# Altium PCB ECTU_PCB.PcbDoc (part 3 of 3)
Units mm, origin at the board's own origin, x right, y up, seen from the top; angles counter-clockwise.
Board outline 155 x 102 mm, 4 copper layers (Top Layer, Mid Top, Mid Bottom, Bottom Layer), stack 0.603 mm thick; 266 components, 187 nets, 917 pads, 241 vias.
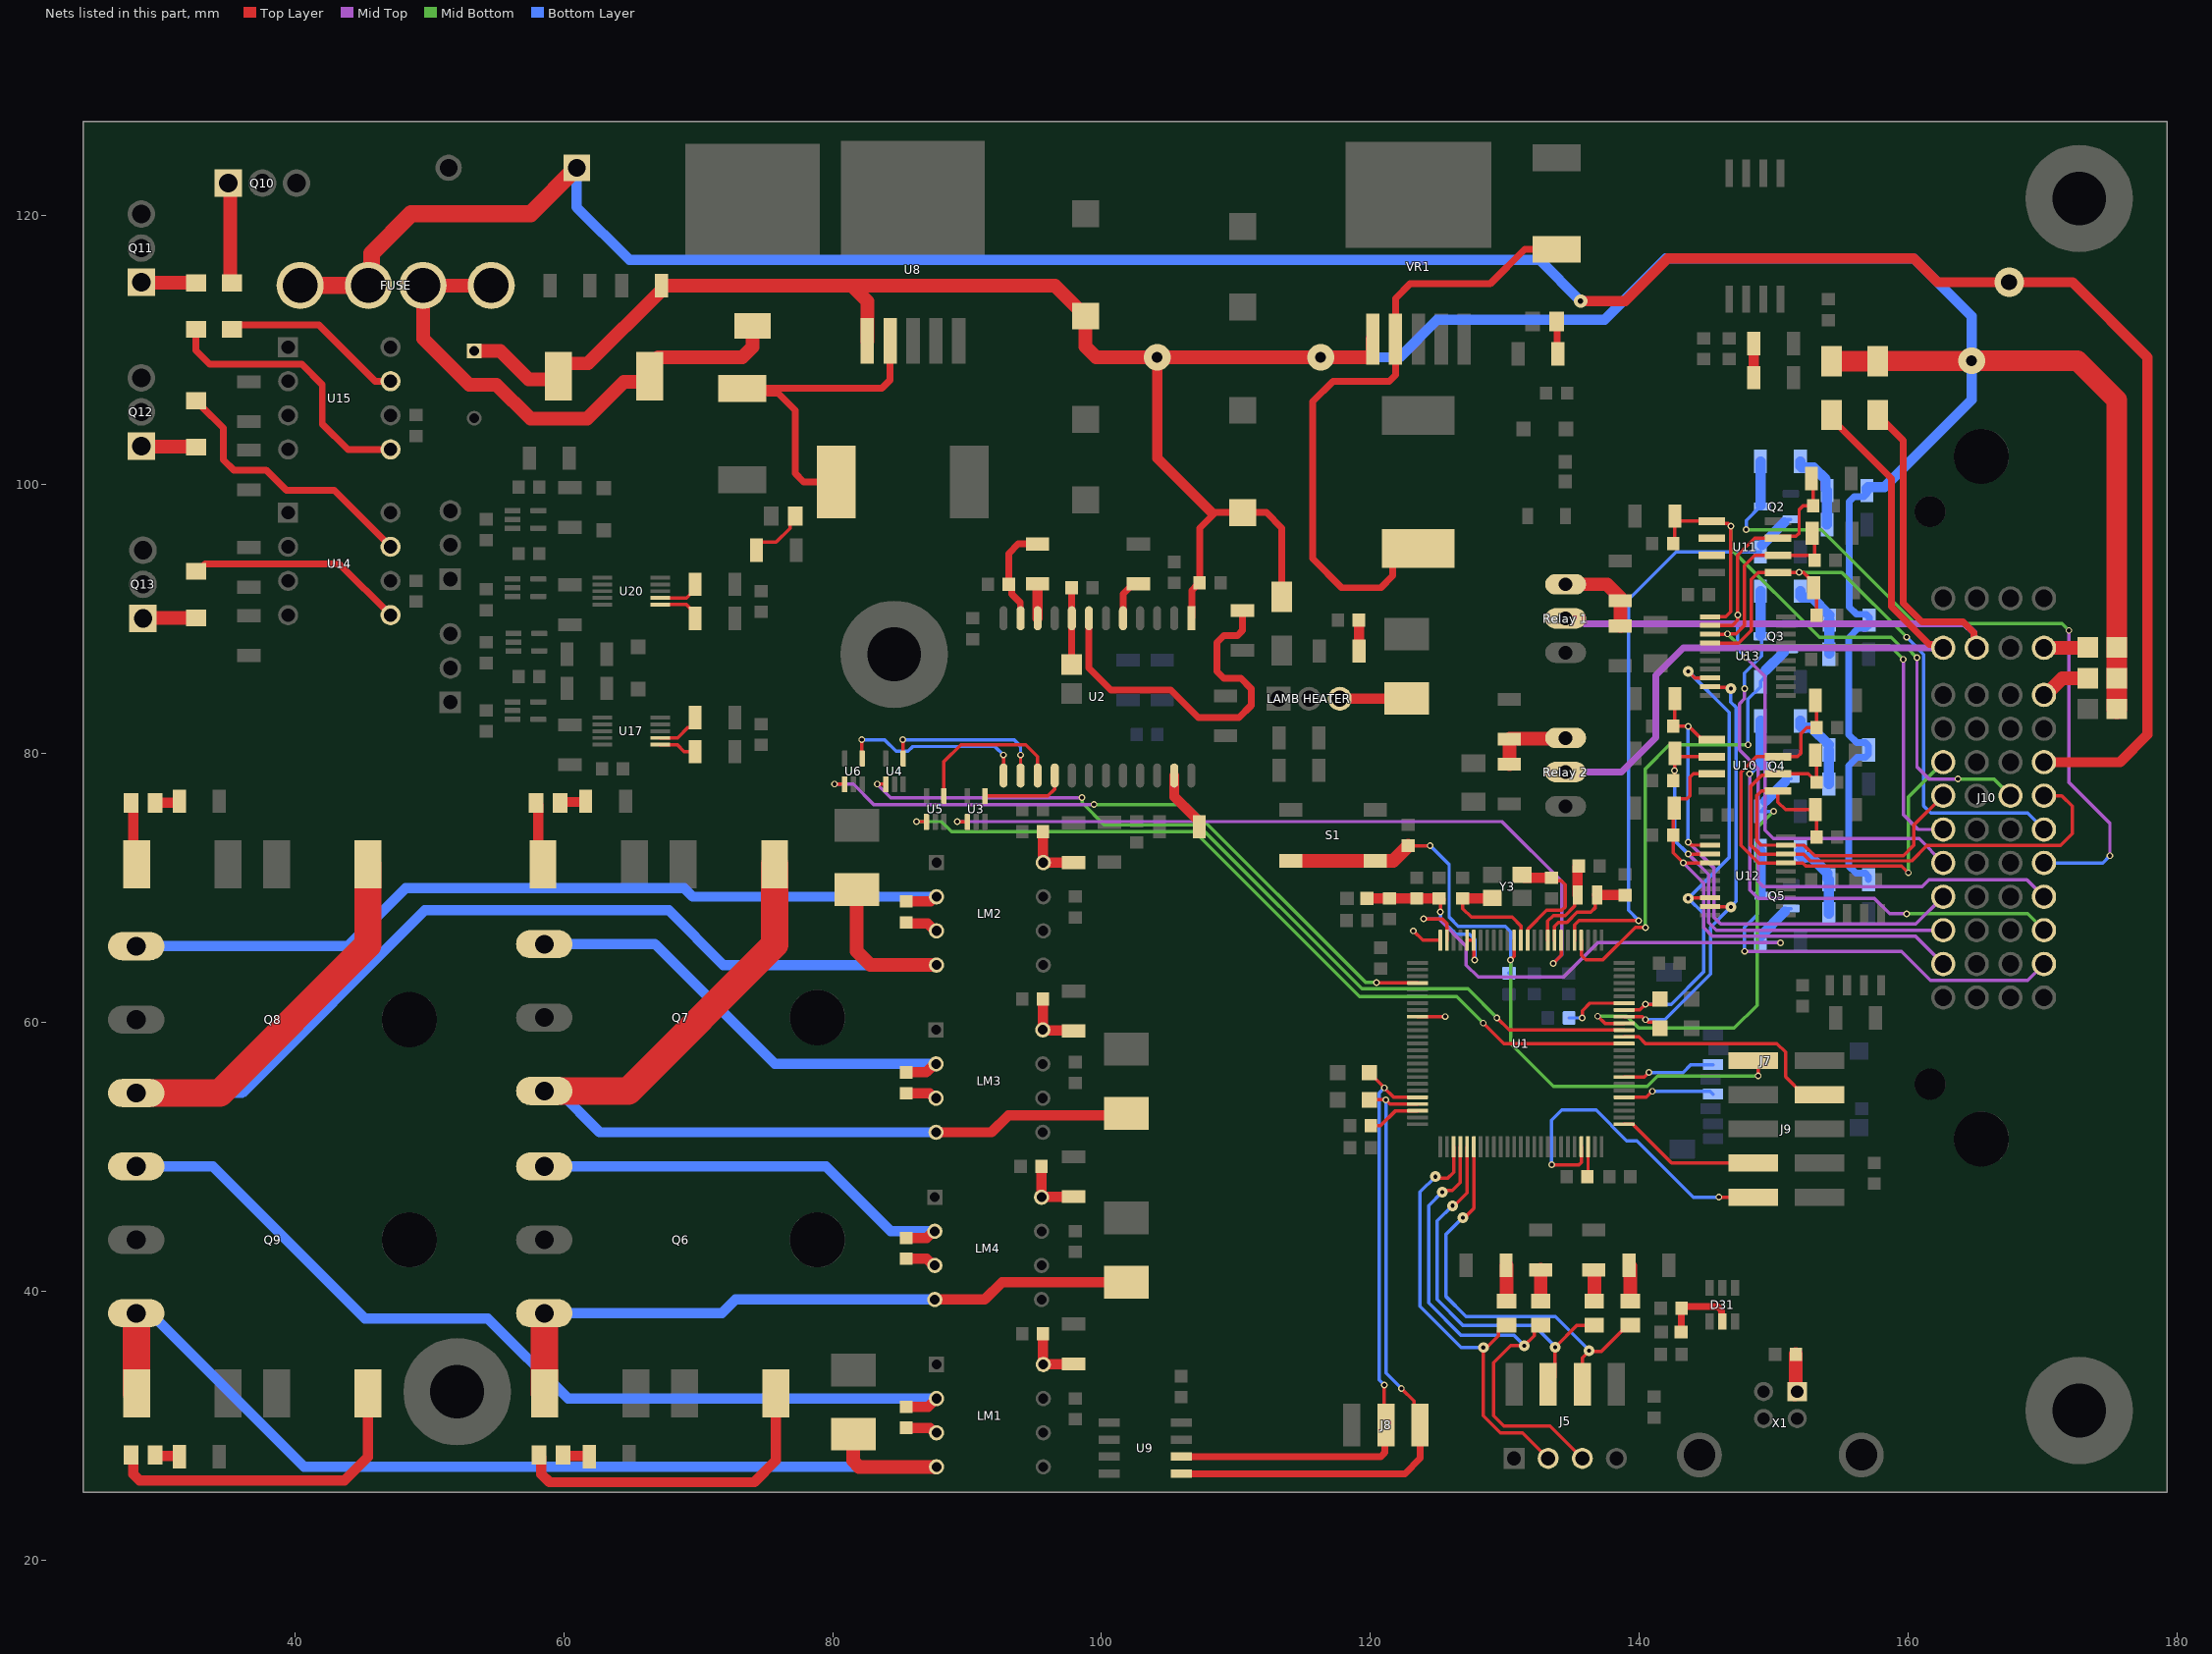
[diagram p5: the nets of this part, all layers, seen from the top]

## Via types
v1: diameter 0.5, hole 0.3, Top Layer to Bottom Layer, 142 vias
v2: diameter 0.8, hole 0.3, Top Layer to Bottom Layer, 59 vias
v3: diameter 2.2, hole 1.2, Top Layer to Bottom Layer, 31 vias
v4: diameter 2, hole 0.8, Top Layer to Bottom Layer, 6 vias
v5: diameter 1, hole 0.4, Top Layer to Bottom Layer, 3 vias

## Nets (pads, with @x,y where several pads share a name; then routed paths per layer and width w, separated by ;. In a path a pad name is that pad's centre, name@x,y a point inside that pad or via, vN(x,y) a via of type N, cw(c..) or ccw(c..) an arc to the next point about the centre after c; other vN are vias at no path point) (continued)
NetC15_2: C15.2 U1.48 | length 3.9
  Top Layer w0.254: C15.2@120.028,52.324 120.777,52.324 121.873,53.42 U1.48@123.511,53.42
NetC16_2: C16.2 U1.73 | length 2.2
  Top Layer w0.254: C16.2@136.144,48.514 136.191,48.561 U1.73@136.191,50.74
NetC17_1: C17.1 NT5.2 U2.8 | length 5.7
  Top Layer w0.508: C17.1@97.777,92.329 97.784,92.323 97.784,90.066 U2.8@97.79,90.059 NT5.2@97.79,86.614
NetC26_1: C26.1 X1.1 | length 3
  Top Layer w1.016: X1.1@151.567,32.317 151.651,32.401 C26.1@151.651,35.306
NetC54_1: C54.1 LM4.8 R56.2 | length 4.7
  Top Layer w0.762: C54.1@95.53,49.276 95.534,49.272 95.534,46.994 LM4.8@95.537,46.99 95.559,47.012 97.895,47.012 R56.2@97.917,47.034
NetC55_1: C55.1 LM4.3 | length 2.3
  Top Layer w0.762: C55.1@85.471,42.405 87,42.405 87.495,41.91 LM4.3@87.597,41.91
NetC55_2: C55.2 LM4.2 Q6.B | length 33.4
  Top Layer w0.762: C55.2@85.471,43.955 87,43.955 87.495,44.45 LM4.2@87.597,44.45
  Bottom Layer w0.762: Q6.B@58.547,49.276 79.502,49.276 84.328,44.45 LM4.2@87.597,44.45
NetC56_1: C56.1 LM3.8 R57.2 | length 4.6
  Top Layer w0.762: C56.1@95.644,61.722 95.637,61.716 95.637,59.442 LM3.8@95.631,59.436 95.673,59.394 97.875,59.394 R57.2@97.917,59.353
NetC57_1: C57.1 LM3.3 | length 2.4
  Top Layer w0.762: C57.1@85.471,54.724 87.221,54.724 87.589,54.356 LM3.3@87.691,54.356
NetC57_2: C57.2 LM3.2 Q7.B | length 35.3
  Top Layer w0.762: C57.2@85.471,56.274 86.968,56.274 87.59,56.896 LM3.2@87.691,56.896
  Bottom Layer w0.762: Q7.B@58.547,65.811 66.777,65.811 75.692,56.896 LM3.2@87.691,56.896
NetC60_1: C60.1 LM2.8 R62.2 | length 4.5
  Top Layer w0.762: C60.1@95.644,74.168 95.654,74.158 95.654,71.892 LM2.8@95.664,71.882 R62.2@97.917,71.882
NetC61_1: C61.1 LM2.3 | length 2.5
  Top Layer w0.762: C61.1@85.471,67.437 85.55,67.358 87.066,67.358 87.622,66.802 LM2.3@87.724,66.802
NetC61_2: C61.2 LM2.2 Q8.B | length 64
  Top Layer w0.762: C61.2@85.471,68.987 87.267,68.987 87.622,69.342 LM2.2@87.724,69.342
  Bottom Layer w0.762: Q8.B@28.194,65.659 43.942,65.659 48.26,69.977 68.961,69.977 69.596,69.342 LM2.2@87.724,69.342
NetC62_1: C62.1 LM1.3 | length 2.4
  Top Layer w0.762: C62.1@85.471,29.832 87.254,29.832 87.622,29.464 LM1.3@87.724,29.464
NetC62_2: C62.2 LM1.2 Q9.B | length 69.2
  Top Layer w0.762: C62.2@85.471,31.382 87.102,31.382 LM1.2@87.724,32.004
  Bottom Layer w0.762: Q9.B@28.194,49.276 33.909,49.276 45.212,37.973 54.356,37.973 60.325,32.004 LM1.2@87.724,32.004
NetC63_1: C63.1 LM1.8 R63.2 | length 4.6
  Top Layer w0.762: C63.1@95.644,36.83 95.654,36.82 95.654,34.554 LM1.8@95.664,34.544 95.686,34.566 97.895,34.566 R63.2@97.917,34.588
NetC78_1: C78.1 R88.1 | length 2.3
  Top Layer w0.508: C78.1@119.139,89.916 C78.1@119.152,89.903 ; R88.1@119.152,87.643 R88.1@119.165,87.63
  Top Layer w0.762: R88.1@119.152,87.643 C78.1@119.152,89.903
NetC79_1: C79.1 R5.1 U2.11 | length 7.6
  Top Layer w0.508: U2.11@93.98,90.059 93.962,90.077 93.962,91.204 93.31,91.856 93.31,92.377 C79.1@93.104,92.583 93.104,94.882 93.809,95.587 R5.1@95.25,95.587
NetD2_A: D2.A R14.2 | length 4.5
  Top Layer w0.254: R14.2@74.339,95.123 74.339,95.503 74.57,95.734 75.795,95.734 76.823,96.762 76.823,97.259 D2.A@77.227,97.663
NetD3_A: D3.A R15.2 | length 2.4
  Top Layer w0.508: D3.A@133.869,112.141 133.905,112.105 133.905,109.764 R15.2@133.941,109.728
NetD4_C: D4.C L1.1 VR1.2 | length 48.4
  Top Layer w0.508: L1.1@123.571,95.253 122.862,95.253 121.666,94.057 121.666,93.218 120.777,92.329 117.856,92.329 115.697,94.488 115.697,106.172 117.221,107.696 121.412,107.696 121.871,108.155 VR1.2@121.871,110.821 121.871,113.87 122.936,114.935 128.905,114.935 131.474,117.504 D4.C@133.858,117.504
NetD5_C: D5.C L2.1 U8.2 | length 25.3
  Top Layer w0.508: D5.C@73.279,107.159 D5.C@74.832,107.159 ; L2.1@80.267,100.203 77.851,100.203 77.216,100.838 77.216,105.537 75.953,106.8 75.13,106.8 74.832,107.097 D5.C@74.832,107.159 ; U8.2@84.279,110.685 84.279,107.774 83.664,107.159 D5.C@74.832,107.159
NetD6_1: D6.1 D7.A FUSE.1A FUSE.1B | length 40.3
  Top Layer w1.016: FUSE.1A@54.608,114.819 FUSE.1B@49.528,114.819 49.528,110.873 52.959,107.442 54.991,107.442 57.531,104.902 61.722,104.902 64.463,107.643 65.958,107.643 D7.A@66.392,108.077 66.392,108.855 67.011,109.474 73.279,109.474 74.041,110.236 D6.1@74.041,111.818
NetD8_A: D8.A R20.2 | length 2.7
  Top Layer w0.254: R20.2@130.085,41.921 R20.2@130.129,41.877
  Top Layer w1.016: D8.A@130.129,39.254 R20.2@130.129,41.877
NetD9_A: D9.A R21.2 | length 2.3
  Top Layer w1.016: D9.A@132.669,39.265 R21.2@132.669,41.584
NetD10_A: D10.A R22.2 | length 2.3
  Top Layer w0.254: R22.2@136.606,41.584 R22.2@136.652,41.538
  Top Layer w1.016: D10.A@136.652,39.265 R22.2@136.652,41.538
NetD11_A: D11.A R23.2 | length 2.7
  Top Layer w0.254: R23.2@139.236,41.921 R23.2@139.319,41.838
  Top Layer w1.016: D11.A@139.319,39.265 R23.2@139.319,41.838
NetD16_A: D16.A R54.2 | length 2
  Top Layer w0.762: D16.A@59.955,27.813 60.019,27.749 61.829,27.749 R54.2@61.893,27.686
NetD16_C: D16.C D17.A | length 24.9
  Top Layer w0.762: D16.C@58.155,27.813 58.324,27.644 58.324,26.385 58.928,25.781 74.168,25.781 75.79,27.403 D17.A@75.79,32.385
NetD18_A: D18.A R55.2 | length 2
  Top Layer w0.762: D18.A@59.725,76.327 59.789,76.391 61.57,76.391 R55.2@61.634,76.454
NetD18_C: D18.C D19.A | length 4.8
  Top Layer w0.762: D18.C@57.925,76.327 58.094,76.158 58.094,72.11 D19.A@58.449,71.755
NetD20_A: D20.A LM4.4 Q6.E R59.1 | length 50.2
  Top Layer w0.762: Q6.E@58.547,38.354 Q6.E@58.562,38.339 ; D20.A@58.562,32.4 D20.A@58.576,32.385 ; LM4.4@87.597,39.37 91.313,39.37 92.606,40.663 R59.1@101.854,40.663
  Top Layer w2.032: D20.A@58.562,32.4 Q6.E@58.562,38.339
  Bottom Layer w0.762: Q6.E@58.547,38.354 71.755,38.354 72.771,39.37 LM4.4@87.597,39.37
NetD21_A: D21.A LM3.4 Q7.E R64.2 | length 72.8
  Top Layer w0.762: LM3.4@87.691,51.816 91.821,51.816 93.091,53.086 101.704,53.086 R64.2@101.854,53.236
  Top Layer w2.032: Q7.E@58.547,54.889 64.795,54.889 75.687,65.781 D21.A@75.687,71.755
  Bottom Layer w0.762: Q7.E@58.547,54.889 59.595,54.889 62.668,51.816 LM3.4@87.691,51.816
NetD22_A: D22.A R60.2 | length 1.9
  Top Layer w0.762: D22.A@29.602,76.327 31.309,76.327 31.413,76.431 R60.2@31.413,76.454
NetD22_C: D22.C D23.A | length 4.7
  Top Layer w0.762: D22.C@27.802,76.327 27.971,76.158 27.971,72.007 D23.A@28.223,71.755
NetD24_A: D24.A R61.2 | length 1.9
  Top Layer w0.762: D24.A@29.602,27.813 29.666,27.749 31.35,27.749 R61.2@31.413,27.686
NetD24_C: D24.C D25.A | length 24.6
  Top Layer w0.762: D24.C@27.802,27.813 27.971,27.644 27.971,26.385 28.448,25.908 43.688,25.908 45.437,27.657 D25.A@45.437,32.385
NetD26_A: D26.A LM2.4 Q8.E R65.1 | length 105.6
  Top Layer w1.016: R65.1@81.788,69.873 81.788,65.278 82.804,64.262 LM2.4@87.724,64.262
  Top Layer w2.032: Q8.E@28.194,54.737 34.417,54.737 45.437,65.757 D26.A@45.437,71.755
  Bottom Layer w0.762: Q8.E@28.194,54.737 36.068,54.737 49.657,68.326 67.818,68.326 71.882,64.262 LM2.4@87.724,64.262
NetD27_A: D27.A LM1.4 Q9.E R84.1 | length 78.6
  Top Layer w0.762: Q9.E@28.194,38.354 Q9.E@28.209,38.339 ; D27.A@28.209,32.4 D27.A@28.223,32.385
  Top Layer w1.016: R84.1@81.534,29.36 81.534,27.37 81.98,26.924 LM1.4@87.724,26.924
  Top Layer w2.032: D27.A@28.209,32.4 Q9.E@28.209,38.339
  Bottom Layer w0.762: Q9.E@28.194,38.354 29.242,38.354 40.672,26.924 LM1.4@87.724,26.924
NetJ11_IN: "Relay 1.IN" R44.2 R45.1 | length 6.6
  Top Layer w1.016: 134.525,92.583 137.614,92.583 138.566,91.631 R45.1@138.566,91.38 ; R44.2@138.589,89.491 R45.1@138.589,91.357
NetJ12_IN: "Relay 2.IN" R49.2 R50.1 | length 6.1
  Top Layer w1.016: R49.2@130.334,79.204 R50.1@130.334,81.07 130.376,81.111 134.484,81.111 134.525,81.153
NetQ1_3: "LAMB HEATER.3" R58.1 | length 5
  Top Layer w0.508: R58.1@122.659,84.074 R58.1@122.682,84.097
  Top Layer w0.762: 117.723,84.074 R58.1@122.659,84.074
NetQ10_1: Q10.1 R68.2 | length 7.5
  Top Layer w0.762: Q10.1@35.052,122.428 Q10.1@35.179,122.301 ; R68.2@35.179,115.136 R68.2@35.306,115.009
  Top Layer w1.016: R68.2@35.179,115.136 Q10.1@35.179,122.301
NetQ11_1: Q11.1 R69.2 | length 4.1
  Top Layer w0.762: Q11.1@28.575,115.064 Q11.1@28.602,115.036 ; R69.2@32.612,115.036 R69.2@32.639,115.009
  Top Layer w1.016: Q11.1@28.602,115.036 R69.2@32.612,115.036
NetQ12_1: Q12.1 R70.2 | length 4.1
  Top Layer w0.762: Q12.1@28.575,102.873 Q12.1@28.614,102.835 ; R70.2@32.6,102.835 R70.2@32.639,102.796
  Top Layer w1.016: Q12.1@28.614,102.835 R70.2@32.6,102.835
NetQ13_1: Q13.1 R71.2 | length 4
  Top Layer w0.762: Q13.1@28.702,90.048 Q13.1@28.726,90.072 ; R71.2@32.615,90.072 R71.2@32.639,90.096
  Top Layer w1.016: Q13.1@28.726,90.072 R71.2@32.615,90.072
NetR1_1: R1.1 U2.23 | length 4.6
  Top Layer w0.762: U2.23@105.41,78.359 105.41,76.79 107.167,75.033 107.167,74.653 R1.1@107.271,74.549
NetR2_2: R2.2 U1.94 | length 4.9
  Top Layer w0.254: v1(135.763,60.325) 135.763,60.864 136.319,61.42 U1.94@138.871,61.42
  Bottom Layer w0.254: R2.2@134.775,60.325 v1(135.763,60.325)
NetR3_2: R3.2 U2.5 | length 3.3
  Top Layer w0.508: U2.5@101.6,90.059 101.6,91.864 102.363,92.627 R3.2@102.743,92.627
NetR4_2: R4.2 U2.7 | length 27.9
  Top Layer w0.508: U2.7@99.06,90.059 99.06,86.36 100.711,84.709 105.156,84.709 107.188,82.677 110.236,82.677 111.125,83.566 111.125,84.836 110.363,85.598 109.093,85.598 108.585,86.106 108.585,88.265 109.093,88.773 110.109,88.773 110.49,89.154 R4.2@110.49,90.634
NetR5_2: R5.2 U2.10 | length 2.6
  Top Layer w0.762: U2.10@95.25,90.059 R5.2@95.25,92.627
NetR24_1: 5V.1@153.968,97.028 R26.2 VIN.1@153.968,99.568 | length 6
  Bottom Layer w0.762: R26.2@151.975,101.727 151.975,101.386 152.079,101.282 152.972,101.282 153.864,100.39 153.864,99.672 VIN.1@153.968,99.568 5V.1@153.968,97.028
NetR28_1: 5V.1@154.095,87.376 R30.2 VIN.1@154.139,89.916 | length 6.1
  Bottom Layer w0.254: 5V.1@154.095,87.376 5V.1@154.139,87.42 ; VIN.1@154.139,89.916 VIN.1@154.139,90.296
  Bottom Layer w0.762: R30.2@151.975,92.075 151.975,91.695 152.079,91.591 152.844,91.591 VIN.1@154.139,90.296 ; 5V.1@154.139,87.42 VIN.1@154.139,89.916
NetR32_1: 5V.1@154.095,77.724 R34.2 VIN.1@154.095,80.264 | length 6
  Bottom Layer w0.254: VIN.1@154.095,80.264 VIN.1@154.095,80.644
  Bottom Layer w0.762: R34.2@151.975,82.423 151.975,82.043 152.079,81.939 152.8,81.939 VIN.1@154.095,80.644 ; 5V.1@154.095,77.724 VIN.1@154.095,80.264
NetR36_1: 5V.1@154.095,68.072 R38.2 VIN.1@154.095,70.612 | length 6
  Bottom Layer w0.762: R38.2@151.975,72.771 151.975,72.391 152.079,72.287 152.8,72.287 153.991,71.096 153.991,70.716 VIN.1@154.095,70.612 5V.1@154.095,68.072
NetR75_2: R75.2 U17.1 | length 2.8
  Top Layer w0.254: U17.1@67.165,80.661 68.437,80.661 68.961,80.137 R75.2@69.767,80.137
NetR77_2: R77.2 U17.2 | length 3.5
  Top Layer w0.254: U17.2@67.165,81.161 68.461,81.161 69.239,81.939 69.409,81.939 69.767,82.297 R77.2@69.767,82.677
NetR80_2: R80.2 U20.1 | length 3.2
  Top Layer w0.254: U20.1@67.174,91.075 69.115,91.075 69.767,90.423 R80.2@69.767,90.043
NetR81_2: R81.2 U20.2 | length 3.2
  Top Layer w0.254: U20.2@67.174,91.575 69.139,91.575 69.767,92.203 R81.2@69.767,92.583
nRESET: C22.2 J9.10 R10.2 S1.1 S1.2 U1.14 | length 54
  Top Layer w0.254: C22.2@122.809,73.139 v1(124.447,73.139) ; v1(130.429,64.643) 130.691,64.905 U1.14@130.691,66.1 ; J9.10@148.466,57.15 148.844,56.772 v1(148.844,56.007)
  Top Layer w1.016: S1.2@114.071,72.014 121.684,72.014 C22.2@122.809,73.139
  Mid Bottom w0.254: v1(130.429,64.643) 130.429,58.42 133.604,55.245 140.589,55.245 141.351,56.007 v1(148.844,56.007)
  Bottom Layer w0.254: v1(124.447,73.139) 125.857,71.729 125.857,67.818 126.545,67.13 130.036,67.13 130.429,66.737 v1(130.429,64.643) 130.429,63.782 R10.2@130.302,63.655
OSC_16_IN: C20.2 U1.12 Y3.1 | length 9.5
  Top Layer w0.254: U1.12@131.691,66.1 131.704,66.113 131.704,66.934 133.096,68.326 134.239,68.326 134.493,68.58 134.493,70.231 134.199,70.525 133.704,70.525 C20.2@133.477,70.752
  Top Layer w0.762: Y3.1@131.275,70.954 131.477,70.752 C20.2@133.477,70.752
OSC_16_OUT: C32.2 U1.13 Y3.3 | length 9.6
  Top Layer w0.254: C32.2@126.873,69.202 126.873,68.453 127.508,67.818 129.413,67.818 129.409,67.822 130.552,67.822 131.191,67.183 U1.13@131.191,66.1 ; Y3.3@128.809,68.781 128.76,68.83 128.651,68.83 129.023,69.202 Y3.3@129.075,69.254
  Top Layer w0.762: C32.2@126.873,69.202 Y3.3@129.023,69.202
OSC_32_IN: C18.2 U1.8 Y2.2 | length 7.7
  Top Layer w0.254: U1.8@133.691,66.1 133.691,67.143 133.985,67.437 134.62,67.437 135.382,68.199 136.398,68.199 136.736,68.537 136.736,69.336 Y2.2@136.869,69.469 ; C18.2@138.925,69.469 C18.2@138.938,69.456
  Top Layer w0.762: Y2.2@136.869,69.469 C18.2@138.925,69.469
OSC_32_OUT: C19.2 U1.9 Y2.1 | length 7
  Top Layer w0.254: U1.9@133.191,66.1 133.191,67.532 133.604,67.945 134.493,67.945 135.171,68.623 135.171,69.221 Y2.1@135.419,69.469 ; C19.2@135.419,71.551 C19.2@135.496,71.628
  Top Layer w0.762: Y2.1@135.419,69.469 C19.2@135.419,71.551
Output_Ig_1: R68.1 U15.7 | length 13.7
  Top Layer w0.508: R68.1@35.306,111.559 35.634,111.887 41.783,111.887 45.969,107.701 47.112,107.701 U15.7@47.117,107.696
Output_Ig_2: R69.1 U15.5 | length 20.8
  Top Layer w0.508: R69.1@32.639,111.559 32.639,109.982 33.655,108.966 40.513,108.966 42.037,107.442 42.037,104.521 43.942,102.616 U15.5@47.117,102.616
Output_Ig_3: R70.1 U14.7 | length 20.4
  Top Layer w0.508: R70.1@32.639,106.246 32.764,106.246 33.008,106.002 33.008,105.877 34.671,104.214 34.671,101.854 35.433,101.092 37.846,101.092 39.37,99.568 42.926,99.568 U14.7@47.117,95.377
Output_Ig_4: R71.1 U14.5 | length 16.3
  Top Layer w0.508: R71.1@32.639,93.546 32.764,93.546 33.325,94.107 43.307,94.107 U14.5@47.117,90.297
PWM_MCU_OUT_1: Q2.2 R27.1 U1.5 | length 44.5
  Top Layer w0.254: U1.5@135.191,66.1 135.191,67.246 135.509,67.564 v1(139.954,67.564)
  Bottom Layer w0.254: v1(139.954,67.564) 139.192,68.326 139.192,91.44 142.748,94.996 R27.1@149.015,94.996 ; Q2.2@150.777,97.174 150.777,97.249 150.95,97.422 Q2.2@151.265,97.422
  Bottom Layer w0.762: R27.1@149.119,95.516 Q2.2@150.777,97.174
PWM_MCU_OUT_2: Q3.2 R31.1 U1.4 | length 35.8
  Top Layer w0.254: U1.4@135.691,66.1 135.691,64.969 136.017,64.643 137.287,64.643 139.7,67.056 v1(140.462,67.056)
  Mid Bottom w0.254: v1(140.462,67.056) 140.462,78.867 142.24,80.645 v1(148.082,80.645)
  Bottom Layer w0.254: v1(148.082,80.645) 148.082,84.031 149.015,84.964 R31.1@149.015,85.344 149.373,85.702 R31.1@149.373,86.165 ; Q3.2@150.73,87.522 150.73,87.597 150.903,87.77 Q3.2@151.218,87.77
  Bottom Layer w0.762: R31.1@149.373,86.165 Q3.2@150.73,87.522
PWM_MCU_OUT_3: Q4.2 R35.1 U1.91 | length 34.6
  Top Layer w0.254: v1(136.906,60.452) 137.438,59.92 U1.91@138.871,59.92
  Mid Bottom w0.254: v1(136.906,60.452) 139.065,60.452 139.954,59.563 147.066,59.563 148.768,61.265 148.768,74.473 v1(149.987,75.692)
  Bottom Layer w0.254: R35.1@149.373,76.442 149.373,76.05 R35.1@149.015,75.692 v1(149.987,75.692) ; Q4.2@150.813,77.882 150.813,77.945 150.986,78.118 Q4.2@151.301,78.118
  Bottom Layer w0.762: R35.1@149.373,76.442 Q4.2@150.813,77.882
PWM_MCU_OUT_4: Q5.2 R39.1 U1.24 | length 38.4
  Top Layer w0.254: v1(123.952,67.691) 125.349,67.691 125.691,67.349 U1.24@125.691,66.1
  Mid Top w0.254: v1(123.952,67.691) 125.095,67.691 127.127,65.659 127.127,64.262 128.016,63.373 134.366,63.373 136.906,65.913 v1(150.495,65.913)
  Bottom Layer w0.254: R39.1@149.015,66.42 R39.1@149.015,66.04 149.142,65.913 v1(150.495,65.913) ; Q5.2@150.813,68.218 150.813,68.293 150.986,68.466 Q5.2@151.301,68.466
  Bottom Layer w0.762: R39.1@149.015,66.42 Q5.2@150.813,68.218
PWM_MCU_OUT_5: U1.25 | length 2.3
  Top Layer w0.254: v1(123.19,66.802) 123.892,66.1 U1.25@125.191,66.1
PWM_MCU_OUT_6: U1.34 | length 2.1
  Top Layer w0.254: U1.34@123.511,60.42 v1(125.571,60.42)
PWM_OUT_1: J10.E4 Q2.3 R26.1 | length 55.7
  Mid Top w0.254: v1(171.958,89.154) 171.958,77.851 175.006,74.803 v1(175.006,72.39)
  Mid Bottom w0.254: v1(147.955,96.647) 153.543,96.647 160.528,89.662 171.45,89.662 v1(171.958,89.154)
  Bottom Layer w0.254: v1(147.955,96.647) 147.955,97.335 Q2.3@148.992,98.372 ; J10.E4@170.104,71.857 174.473,71.857 v1(175.006,72.39)
  Bottom Layer w0.762: Q2.3@149.015,98.453 R26.1@149.015,101.727
PWM_OUT_2: J10.D4 Q3.3 R30.1 | length 44.9
  Mid Top w0.254: v1(147.828,84.836) 147.828,84.074 147.447,83.693 147.447,80.264 148.844,78.867 148.844,70.485 149.225,70.104 161.036,70.104 161.544,70.612 168.834,70.612 J10.D4@170.104,69.342
  Bottom Layer w0.254: v1(147.828,84.836) 147.828,85.979 149.098,87.249 Q3.3@149.098,88.72
  Bottom Layer w0.762: Q3.3@149.015,88.801 R30.1@149.015,92.075
PWM_OUT_3: J10.C4 Q4.3 R34.1 | length 36.1
  Mid Top w0.254: v1(148.209,78.486) 148.209,69.85 148.844,69.215 157.48,69.215 158.623,68.072 v1(159.893,68.072)
  Mid Bottom w0.254: v1(159.893,68.072) 168.885,68.072 J10.C4@170.104,66.853
  Bottom Layer w0.254: v1(148.209,78.486) 148.218,78.495 148.293,78.495 148.947,79.149 Q4.3@149.015,79.149
  Bottom Layer w0.762: Q4.3@149.015,79.149 R34.1@149.015,82.423
PWM_OUT_4: J10.B4 Q5.3 R38.1 | length 31.7
  Mid Top w0.254: v1(147.828,65.278) 159.512,65.278 161.671,63.119 168.885,63.119 J10.B4@170.104,64.338
  Bottom Layer w0.254: v1(147.828,65.278) 147.828,67.056 148.768,67.996 148.768,69.25 Q5.3@148.987,69.469
  Bottom Layer w0.762: Q5.3@148.987,69.469 149.015,69.497 R38.1@149.015,72.771
Ralay_1_1: "Relay 1.GND" D12.2 J10.L2 | length 54.2
  Top Layer w0.508: D12.2@157.734,105.188 159.639,103.283 159.639,91.186 161.036,89.789 164.084,89.789 164.889,88.984 164.889,88.07 J10.L2@165.1,87.859
  Mid Top w0.508: 134.525,90.043 135.562,90.043 135.943,89.662 164.211,89.662 164.889,88.984 164.889,88.07 J10.L2@165.1,87.859
Ralay_1_2: J10.L4 NT3.1 | length 3.3
  Top Layer w0.762: J10.L4@170.104,87.859 J10.L4@170.117,87.871 ; NT3.1@173.342,87.871 NT3.1@173.355,87.884
  Top Layer w1.016: J10.L4@170.117,87.871 NT3.1@173.342,87.871
Ralay_2_1: "Relay 2.GND" D14.2 J10.L1 | length 55.9
  Top Layer w0.508: D14.2@154.305,105.188 154.305,104.838 154.826,104.317 154.89,104.317 158.75,100.457 158.75,90.932 161.576,88.106 162.363,88.106 J10.L1@162.611,87.859
  Mid Top w0.508: 134.525,78.613 138.669,78.613 141.224,81.168 141.224,85.801 143.281,87.859 J10.L1@162.611,87.859
Ralay_2_2: J10.K4 NT4.1 | length 3.8
  Top Layer w1.016: J10.K4@170.104,84.353 170.205,84.353 171.45,85.598 NT4.1@173.355,85.598
SCL_1: R17.2 U1.92 U12.19 U13.19 | length 34.6
  Top Layer w0.254: U1.92@138.871,60.42 140.228,60.42 140.45,60.198 v1(140.462,60.198) 140.474,60.198 140.661,60.011 141.093,60.011 R17.2@141.541,59.563 ; U12.19@145.263,68.605 145.275,68.593 146.799,68.593 v2(146.812,68.58) ; U13.19@145.263,84.963 145.313,84.912 146.736,84.912 v2(146.812,84.836)
  Bottom Layer w0.254: v1(140.462,60.198) 141.896,60.198 145.288,63.59 145.288,67.056 v2(146.812,68.58) 146.812,68.621 147.193,69.002 147.193,83.439 146.812,83.82 v2(146.812,84.836)
SCL_2: J8.02 R19.2 U1.46 U9.6 | length 47.2
  Top Layer w0.254: R19.2@119.92,56.261 121.022,55.159 121.022,55.127 v1(121.031,55.118) 121.729,54.42 U1.46@123.511,54.42 ; v1(121.031,33.02) 121.031,30.172 J8.02@121.158,30.045
  Top Layer w0.508: U9.6@105.931,27.686 120.777,27.686 121.082,27.991 121.082,29.969 J8.02@121.158,30.045
  Bottom Layer w0.254: v1(121.031,33.02) 120.65,33.401 120.65,54.737 v1(121.031,55.118)
SD_CK: J7.5 U1.80 | length 6.9
  Top Layer w0.254: U1.80@138.871,54.42 140.526,54.42 v1(140.97,54.864)
  Bottom Layer w0.254: v1(140.97,54.864) 145.277,54.864 J7.5@145.488,54.653
SD_CMD: J7.3 U1.83 | length 7
  Top Layer w0.254: U1.83@138.871,55.92 140.363,55.92 140.704,56.261 v1(140.716,56.261)
  Bottom Layer w0.254: v1(140.716,56.261) 143.256,56.261 143.848,56.853 J7.3@145.488,56.853
SDA_1: R16.1 U1.93 U12.18 U13.18 | length 37.1
  Top Layer w0.254: U1.93@138.871,60.92 140.041,60.92 v1(140.462,61.341) 141.16,61.341 R16.1@141.541,61.722 ; v2(143.637,69.215) 143.662,69.24 145.237,69.24 U12.18@145.263,69.266 ; v2(143.637,86.106) 143.656,86.106 144.145,85.617 145.256,85.617 U13.18@145.263,85.623
  Bottom Layer w0.254: v1(140.462,61.341) 142.367,61.341 144.78,63.754 144.78,68.072 v2(143.637,69.215) 146.685,72.263 146.685,83.058 v2(143.637,86.106)
SDA_2: J8.01 R18.1 U1.47 U9.5 | length 49.7
  Top Layer w0.254: R18.1@119.92,54.229 v1(121.158,54.229) 121.467,53.92 U1.47@123.511,53.92 ; v1@122.31,32.757 123.232,31.835 123.232,30.511 J8.01@123.698,30.045
  Top Layer w0.508: U9.5@105.931,26.416 122.555,26.416 123.698,27.559 J8.01@123.698,30.045
  Bottom Layer w0.254: v1(121.158,54.229) 121.158,33.909 v1(122.301,32.766)
Sensor_1: C49.2 J10.B1 R47.2 U10.7 U12.14 | length 35.6
  Top Layer w0.254: U12.14@145.263,71.857 v1(143.281,71.857) 142.519,72.619 142.519,75.863 R47.2@142.602,75.946 142.602,76.269 142.96,76.627 143.556,76.627 143.764,76.835 143.764,78.232 144.018,78.486 U10.7@145.39,78.486
  Mid Top w0.254: v1(143.281,71.857) 144.78,70.358 144.78,67.056 145.415,66.421 160.528,66.421 J10.B1@162.611,64.338
Sensor_2: C50.2 J10.C1 R48.2 U10.6 U12.13 | length 36.6
  Top Layer w0.254: C50.2@142.519,77.978 142.621,78.08 v1(142.621,78.74) 142.621,78.752 142.646,78.778 R48.2@142.646,80.01 142.9,79.756 U10.6@145.39,79.756 ; v1(143.637,72.517) U12.13@145.263,72.517
  Mid Top w0.254: v1(143.637,72.517) 145.161,70.993 145.161,67.437 145.745,66.853 J10.C1@162.611,66.853
  Bottom Layer w0.254: v1(142.621,78.74) 142.621,73.533 v1(143.637,72.517)
Sensor_3: C48.2 J10.D1 R46.2 U10.5 U12.12 | length 40.2
  Top Layer w0.254: R46.2@142.646,84.074 142.646,82.169 C48.2@142.519,82.042 143.587,82.042 143.625,82.004 v1(143.637,82.004) 143.646,81.995 143.709,81.995 144.678,81.026 U10.5@145.39,81.026 ; v1(143.637,73.406) 143.649,73.406 143.878,73.177 U12.12@145.263,73.177
  Mid Top w0.254: v1(143.637,73.406) 145.542,71.501 145.542,67.818 146.05,67.31 160.579,67.31 J10.D1@162.611,69.342
  Bottom Layer w0.254: v1(143.637,73.406) v1(143.637,82.004)
Sensor_4: C52.2 J10.E1 R52.2 U11.3 U13.12 | length 48.4
  Top Layer w0.254: U13.12@145.263,89.535 146.939,89.535 147.311,89.907 147.311,90.288 v1(147.32,90.297) 147.32,94.742 148.59,96.012 U11.3@150.317,96.012 150.47,96.164 151.663,96.164 151.892,96.393 151.892,98.134 152.183,98.425 C52.2@152.92,98.425 152.92,100.343 R52.2@152.806,100.457
  Mid Top w0.254: v1(147.955,87.122) 149.352,85.725 149.352,74.295 149.987,73.66 160.807,73.66 J10.E1@162.611,71.857
  Bottom Layer w0.254: v1(147.32,90.297) 147.32,87.757 v1(147.955,87.122)
Sensor_5: C53.2 J10.F1 R53.2 U11.2 U13.13 | length 43.9
  Top Layer w0.254: U13.13@145.263,88.875 146.52,88.875 146.546,88.9 v1(146.558,88.9) 147.193,88.9 147.828,89.535 147.828,93.98 148.59,94.742 U11.2@150.317,94.742 152.696,94.742 C53.2@153.047,94.391 ; R53.2@152.85,96.393 153.047,96.196 C53.2@153.047,94.391 ; C53.2@153.047,94.361 C53.2@153.047,94.391
  Mid Top w0.254: v1(159.639,86.995) 159.639,75.438 160.731,74.346 J10.F1@162.611,74.346
  Mid Bottom w0.254: v1(146.558,88.9) 147.447,88.011 158.623,88.011 v1(159.639,86.995)
Sensor_6: C51.2 J10.F4 R51.2 U11.1 U13.14 | length 47.7
  Top Layer w0.254: U13.14@145.263,88.214 147.396,88.214 148.336,89.154 148.336,92.964 148.844,93.472 U11.1@150.317,93.472 v1(151.892,93.472) 151.901,93.463 152.223,93.463 152.977,92.709 R51.2@152.977,92.329 153.174,92.132 C51.2@153.174,90.297
  Mid Bottom w0.254: v1(151.892,93.472) 155.067,93.472 v1(159.893,88.646)
  Bottom Layer w0.254: v1(159.893,88.646) 161.163,87.376 161.163,76.098 161.696,75.565 168.885,75.565 J10.F4@170.104,74.346
Sensor_7: C44.2 J10.G1 R41.2 U10.1 U12.9 | length 28.1
  Top Layer w0.254: C44.2@153.174,73.787 153.174,75.749 R41.2@153.104,75.819 150.876,75.819 150.317,76.378 U10.1@150.317,77.216 150.314,77.212 149.094,77.212 148.717,76.835 148.717,73.533 149.073,73.177 U12.9@150.901,73.177 152.248,73.177 153.035,72.39 159.639,72.39 160.401,73.152 160.401,74.651 J10.G1@162.611,76.86
Sensor_8: C45.2 J10.G4 R42.2 U10.2 U12.8 | length 41.7
  Top Layer w0.254: R42.2@153.104,79.883 153.174,79.813 C45.2@153.174,77.881 ; C45.2@153.174,77.851 C45.2@153.174,77.881 ; J10.G4@170.104,76.86 171.425,76.86 172.212,76.073 172.212,74.041 171.323,73.152 161.417,73.152 160.274,72.009 152.718,72.009 152.21,72.517 U12.8@150.901,72.517 148.971,72.517 148.28,73.208 148.28,77.541 149.121,78.382 150.213,78.382 U10.2@150.317,78.486 152.569,78.486 C45.2@153.174,77.881
Sensor_9: C43.2 J10.H1 R40.2 U10.3 U12.7 | length 37.9
  Top Layer w0.254: R40.2@153.104,83.947 153.174,83.877 C43.2@153.174,81.915 152.464,81.915 152.019,81.47 152.019,80.01 151.765,79.756 U10.3@150.317,79.756 148.717,79.756 147.574,78.613 147.574,73.152 148.869,71.857 U12.7@150.901,71.857 152.171,71.857 152.4,71.628 159.512,71.628 v1(160.02,71.12)
  Mid Bottom w0.254: v1(160.02,71.12) 160.02,76.759 J10.H1@162.611,79.35
Sensor_10: C46.2 J10.G3 R43.2 U11.5 U13.11 | length 49.5
  Top Layer w0.254: C46.2@142.519,95.631 142.646,95.758 R43.2@142.646,97.64 ; R43.2@142.646,97.663 R43.2@142.646,97.64 ; U13.11@145.263,90.17 146.431,90.17 146.812,90.551 v1(146.812,96.901) 146.8,96.901 146.571,97.13 145.542,97.13 U11.5@145.39,97.282 143.004,97.282 R43.2@142.646,97.64
  Mid Top w0.254: v1(160.655,87.122) 160.655,78.994 161.544,78.105 v1(163.703,78.105)
  Mid Bottom w0.254: v1(146.812,96.901) 146.812,95.236 153.402,88.646 158.75,88.646 159.512,87.884 159.893,87.884 v1(160.655,87.122) ; v1(163.703,78.105) 166.37,78.105 J10.G3@167.615,76.86
Sensor_MAP_OUT: R9.2 R11.2 | length 2.5
  Top Layer w0.762: R11.2@148.507,107.95 R9.2@148.507,110.49
SPI_MISO_CJ: U2.14 U4.4 | length 12.5
  Top Layer w0.254: v1(85.217,81.026) 85.217,81.014 85.247,80.984 U4.4@85.247,79.629 ; U2.14@93.98,78.359 v1(93.98,79.883)
  Bottom Layer w0.254: v1(85.217,81.026) 93.472,81.026 93.98,80.518 v1(93.98,79.883)
SPI_MISO_MCU: U1.90 U4.1 | length 64
  Top Layer w0.254: v1(83.312,77.724) U4.1@83.932,77.724 ; v1(129.413,60.325) 130.318,59.42 U1.90@138.871,59.42
  Mid Top w0.254: v1(83.312,77.724) 84.328,76.708 v1(98.552,76.708)
  Mid Bottom w0.254: v1(98.552,76.708) 98.552,76.327 100.203,74.676 107.188,74.676 119.38,62.484 127.254,62.484 v1(129.413,60.325)
SPI_MOSI_CJ: U2.15 U5.4 | length 11.8
  Top Layer w0.254: U5.4@88.28,76.835 88.28,79.39 89.535,80.645 94.361,80.645 95.25,79.756 U2.15@95.25,78.359
SPI_MOSI_MCU: U1.88 U5.1 | length 60.2
  Top Layer w0.254: v1(86.233,74.93) U5.1@86.965,74.93 ; v1(128.397,59.944) 129.921,58.42 U1.88@138.871,58.42
  Mid Bottom w0.254: v1(86.233,74.93) 88.095,74.93 88.857,74.168 106.934,74.168 119.182,61.92 126.421,61.92 v1(128.397,59.944)
SPI_SCK_CJ: U2.13 U6.4 | length 14.2
  Top Layer w0.254: v1(82.169,81.026) 82.178,81.017 82.178,79.65 U6.4@82.199,79.629 ; U2.13@92.71,78.359 v1(92.71,79.883)
  Bottom Layer w0.254: v1(82.169,81.026) 83.845,81.026 84.709,80.162 85.61,80.162 85.966,80.518 92.075,80.518 v1(92.71,79.883)
SPI_SCK_MCU: U1.29 U6.1 | length 50.3
  Top Layer w0.254: v1(80.137,77.724) U6.1@80.884,77.724 ; v1(120.444,62.956) 120.457,62.956 120.493,62.92 U1.29@123.511,62.92
  Mid Top w0.254: v1(80.137,77.724) 81.534,77.724 83.058,76.2 v1(99.441,76.2)
  Mid Bottom w0.254: v1(99.441,76.2) 106.426,76.2 119.67,62.956 v1(120.444,62.956)
SPI_SS_CJ: U2.16 U3.4 | length 6.4
  Top Layer w0.254: U3.4@91.328,76.835 96.012,76.835 96.5,77.323 96.5,78.339 U2.16@96.52,78.359
SPI_SS_MCU: U1.7 U3.1 | length 55.9
  Top Layer w0.254: v1(89.281,74.93) 89.293,74.93 89.308,74.915 U3.1@90.028,74.915 ; v1(133.604,64.389) 134.191,64.976 U1.7@134.191,66.1
  Mid Top w0.254: v1(89.281,74.93) 129.794,74.93 134.239,70.485 134.239,65.024 v1(133.604,64.389)
SWCLK: J9.04 U1.76 | length 10.8
  Top Layer w0.254: U1.76@138.871,52.42 139.511,52.42 142.401,49.53 J9.04@148.466,49.53
SWDIO: J9.02 U1.72 | length 24.7
  Top Layer w0.254: v1(133.477,49.403) 135.509,49.403 135.691,49.585 U1.72@135.691,50.74 ; v1(145.923,46.99) J9.02@148.466,46.99
  Bottom Layer w0.254: v1(133.477,49.403) 133.477,52.705 134.239,53.467 136.779,53.467 139.065,51.181 139.827,51.181 144.018,46.99 v1(145.923,46.99)
SWO: J9.07 U1.89 | length 17.4
  Top Layer w0.254: U1.89@138.871,58.92 139.962,58.92 140.462,58.42 150.241,58.42 150.876,57.785 150.876,55.945 152.211,54.61 J9.07@153.416,54.61
TVS_11: U11.6
TVS_12: U11.7
UART_1_RX: D9.C J5.05 U1.54 | length 38.1
  Top Layer w0.254: v2(125.349,47.371) 125.453,47.475 126.088,47.475 126.691,48.078 U1.54@126.691,50.74 ; D9.C@132.669,37.465 132.61,37.465 132.187,37.042 132.187,36.683 v2(131.445,35.941) 130.429,35.941 129.159,34.671 129.159,30.734 129.921,29.972 133.35,29.972 J5.05@135.763,27.559
  Bottom Layer w0.254: v2(125.349,47.371) 124.333,46.355 124.333,39.116 126.746,36.703 130.683,36.703 v2(131.445,35.941)
UART_1_TX: D8.C J5.03 U1.53 | length 33.2
  Top Layer w0.254: v2(124.841,48.514) 124.945,48.41 125.535,48.41 125.539,48.406 125.749,48.406 126.191,48.848 U1.53@126.191,50.74 ; D8.C@130.129,37.454 129.954,37.454 129.531,37.031 129.531,36.694 128.397,35.56 128.397,30.734 129.667,29.464 131.318,29.464 J5.03@133.223,27.559
  Bottom Layer w0.254: v2(124.841,48.514) 123.698,47.371 123.698,38.862 126.754,35.806 v2(128.397,35.806)
UART_2_RX: D11.C J5.06 U1.56 | length 31
  Top Layer w0.254: v2(126.873,45.466) 127,45.466 127.691,46.157 U1.56@127.691,50.74 ; J5.06@135.763,33.07 135.763,35.038 136.271,35.546 v2(136.271,35.581) 136.352,35.5 137.179,35.5 139.144,37.465 D11.C@139.319,37.465
  Bottom Layer w0.254: v2(126.873,45.466) 125.603,44.196 125.603,39.624 127.127,38.1 133.752,38.1 v2(136.271,35.581)
UART_2_TX: D10.C J5.04 U1.55 | length 29.2
  Top Layer w0.254: v2(126.111,46.355) 126.238,46.355 127.191,47.308 U1.55@127.191,50.74 ; J5.04@133.223,33.07 133.731,33.578 v2(133.731,35.814) 135.382,37.465 D10.C@136.652,37.465
  Bottom Layer w0.254: v2(126.111,46.355) 124.968,45.212 124.968,39.37 126.873,37.465 132.162,37.465 133.731,35.896 v2(133.731,35.814)
VBUS: C30.1 D31.5 FL2.1 | length 5.8
  Top Layer w0.508: FL2.1@143.102,36.957 143.129,36.984 143.129,38.608 143.129,38.643 143.348,38.862 145.833,38.862 146.131,38.564 146.131,37.785 D31.5@146.177,37.739
VDDA: C74.1 C75.1 C76.1 FL.2 U1.20 U1.21 | length 13.7
  Top Layer w0.254: FL.2@119.734,69.215 FL.2@119.747,69.228 ; v1(125.204,68.217) C76.1@125.204,69.123 ; U1.21@127.191,66.1 127.678,66.1 U1.20@127.691,66.1 ; U1.20@127.691,66.087 127.691,64.726 127.762,64.655 v1(127.762,64.643)
  Top Layer w0.762: FL.2@119.747,69.228 C74.1@121.412,69.228 121.425,69.215 123.431,69.215 C75.1@123.444,69.202 C76.1@125.095,69.202 125.125,69.202 C76.1@125.204,69.123
  Bottom Layer w0.254: v1(125.204,68.217) 125.222,68.235 125.222,67.691 126.365,66.548 127.381,66.548 127.762,66.167 v1(127.762,64.643)
VIN: C12.2 C27.1 C34.P C35.1 D7.C D12.1 D14.1 D30.1 NT1.2 NT3.2 NT4.2 R12.1 U2.1 U8.1 VIN.2 VR1.1 | length 263
  Top Layer w0.508: U2.1@106.68,90.059 106.726,90.105 106.726,92.134 107.066,92.474 107.096,92.474 107.302,92.68 107.302,96.761 108.468,97.927 ; 108.194,97.927 108.468,97.927 ; D30.1@113.411,91.662 113.411,96.774 112.258,97.927 C27.1@110.49,97.927 108.468,97.927
  Top Layer w0.762: v4(104.14,109.474) 104.14,101.981 108.194,97.927
  Top Layer w1.016: C34.P@53.34,109.942 55.285,109.942 57.404,107.823 D7.C@59.338,107.823 ; D7.C@59.592,108.077 59.592,108.527 60.084,109.019 61.811,109.019 R12.1@67.243,114.451 ; R12.1@67.266,114.808 81.407,114.808 ; U8.1@82.579,110.685 82.579,113.636 81.407,114.808 ; VR1.1@120.171,110.821 120.171,109.487 120.158,109.474 v4(116.304,109.474) v4(104.14,109.474) 99.615,109.474 98.806,110.283 C35.1@98.806,112.542 96.54,114.808 81.407,114.808
  Top Layer w1.524: D14.1@154.305,109.188 D12.1@157.734,109.188 157.734,109.191 157.747,109.204 164.703,109.204 v4(164.719,109.22) 172.593,109.22 175.514,106.299 NT3.2@175.514,87.884 NT4.2@175.514,85.598 NT1.2@175.514,83.312
  Bottom Layer w0.508: VIN.2@156.928,99.568 156.928,99.325 156.697,99.094 155.99,99.094 155.619,98.723 155.619,90.888 156.15,90.357 156.868,90.357 157.099,90.126 157.099,89.546 156.868,89.315 156.288,89.315 155.575,88.602 155.575,81.407 156.181,80.801 156.824,80.801 157.055,80.57 157.055,79.942 156.824,79.711 156.196,79.711 155.575,79.09 155.575,71.628 156.117,71.086 156.824,71.086 157.055,70.855 VIN.2@157.055,70.612
  Bottom Layer w0.762: v4(116.304,109.474) 122.174,109.474 124.968,112.268 137.414,112.268 141.986,116.84 160.401,116.84 164.719,112.522 v4(164.719,109.22) 164.719,106.299 158.242,99.822 157.032,99.822 156.928,99.718 VIN.2@156.928,99.568
VIN_Bat: FUSE.2A FUSE.2B J3.1 J10.H4 | length 189.1
  Top Layer w0.762: v5(135.636,113.665) 138.938,113.665 142.113,116.84 160.401,116.84 162.179,115.062 172.212,115.062 177.8,109.474 177.8,81.407 175.743,79.35 J10.H4@170.104,79.35
  Top Layer w1.27: FUSE.2B@40.388,114.819 FUSE.2A@45.468,114.819 45.707,115.058 45.707,117.208 48.641,120.142 57.536,120.142 J3.1@60.965,123.571
  Bottom Layer w0.762: J3.1@60.965,123.571 60.965,120.645 64.897,116.713 132.588,116.713 v5(135.636,113.665)
  other v3: 167.513,115.062
pads on no net: J7.SW J9.05 J9.08 J9.09 J10. J10.H2 J10.H3 J10.L3 MAP1.1 MAP1.5 MAP1.6 MAP1.7 MAP1.8 Q6. Q7. Q8. Q9. U1.1 U1.2 U1.3 U1.17 U1.18 U1.28 U1.31 U1.32 U1.33 U1.35 U1.36 U1.37 U1.38 U1.40 U1.42 U1.45 U1.51 U1.52 U1.57 U1.58 U1.63 U1.64 U1.67 U1.68 U1.69 U1.84 U1.85 U1.86 U1.87 U1.95 U1.96 U1.97 U1.98 U9.1 U9.7 U12.6 U12.10 U12.11 U12.16 U12.17 U13.6 U13.7 U13.8 U13.9 U13.10 U13.16 U13.17 U14.1 U14.8 U15.1 U15.8 U17.3 U17.8 U20.3 U20.8 X1.P1 X1.P2

## Polygon pours and split planes (outlines as drawn)
GND on Mid Bottom "GND_L03_P022" (solid, pour order 22): 24.257,25.019 24.257,127.019 179.257,127.019 179.257,25.019
GND on Bottom Layer "GND_L04_P023" (solid, pour order 23): 24.257,25.019 24.257,127.019 179.257,127.019 179.257,25.019
GND on Top Layer "GND_L01_P024" (solid, pour order 24): 24.257,25.019 24.257,127.019 179.257,127.019 179.257,25.019
GND on Mid Top "GND_L02_P025" (solid, pour order 25): 24.257,25.019 24.257,127.019 179.257,127.019 179.257,25.019

## Other copper
Top Layer:
  pour cut-out: 134.614,70.606 134.614,68.447 137.662,68.447 137.662,70.606
  pour cut-out: 127.889,72.009 127.889,68.326 132.461,68.326 132.461,72.009
Mid Top:
  pour cut-out: 134.62,70.612 134.62,68.453 137.668,68.453 137.668,70.612
  pour cut-out: 127.889,72.009 127.889,68.326 132.461,68.326 132.461,72.009
Mid Bottom:
  pour cut-out: 134.62,70.612 134.62,68.453 137.668,68.453 137.668,70.612
  pour cut-out: 127.889,72.009 127.889,68.326 132.461,68.326 132.461,72.009
Bottom Layer:
  pour cut-out: 134.62,70.612 134.62,68.453 137.668,68.453 137.668,70.612
  pour cut-out: 127.889,72.009 127.889,68.326 132.461,68.326 132.461,72.009

## Silkscreen, mask and mechanical layers (free items; w line width, h text height)
Top Overlay:
  drawing of 76 lines, arcs and shapes, not listed
  text "IG 4" at 95.123,125.984 h0.51
  text "IG 3" at 97.917,125.984 h0.51
  text "IG 2" at 100.711,125.984 h0.51
  text "IG 1" at 103.505,125.984 h0.51
  text "->" at 32.569,123.293 h1.02 r270
  text "GND" at 138.938,123.063 h0.51
  text "E" at 41.459,122.785 h1.02 r270
  text "E" at 34.036,121.666 h0.64
  text "->" at 133.35,121.666 h1.02 r270
  text "E" at 28.218,121.469 h1.02
  text "+" at 60.706,121.37 h1.02
  text "GND / M4" at 168.529,119.507 h0.76 r90
  text "GND" at 161.671,119.38 h0.51
  text "VIN BAT" at 165.735,116.332 h0.51
  text "+" at 61.722,116.226 h0.64
  text "->" at 70.651,115.499 h1.02 r270
  text "*" at 146.299,114.959 h1.02
  text "BAT LV" at 62.738,112.903 h0.51
  text "->" at 27.71,112.579 h1.02
  text "5V" at 135.509,110.998 h0.51
  text "+" at 54.483,110.829 h1.02
  text "*" at 40.604,109.721 h1.02
  text "+" at 110.109,109.432 h1.02
  text "E" at 28.218,109.277 h1.02
  text "+" at 98.42,108.609 h1.02
  text "->" at 63.754,108.458 h1.02 r180
  text "->" at 156.552,106.37 h1.02 r90
  text "->" at 73.787,103.251 h1.02 r90
  text "GND" at 53.34,100.965 h0.51 r90
  text "->" at 27.71,100.387 h1.02
  text "CKP / HALL | IN 1 | IN 2" at 65.786,98.044 h0.51
  text "->" at 63.453,97.44 h1.02 r90
  text "*" at 40.604,97.402 h1.02
  text "E" at 28.321,96.52 h1.02
  text "HALL" at 49.911,96.52 h0.76 r90
  text "CKP" at 48.895,95.25 h0.76 r90
  text "+" at 112.39,95.147 h1.02
  text "+" at 98.425,95.081 h1.02
  text "->" at 135.255,94.742 h1.02 r180
  text "GND / M4" at 82.804,91.567 h0.76
  text "VR" at 50.927,90.551 h0.76
  text "*" at 107.308,89.626 h1.02
  text "->" at 27.813,87.63 h1.02
  text "HALL" at 49.966,87.512 h0.76 r90
  text "->" at 65.993,85.629 h1.02 r90
  text "STM SIGNAL" at 29.527,85.471 h0.51
  text "CMP" at 48.895,85.344 h0.76 r90
  text "S" at 134.239,85.344 h1.02
  text "->" at 111.024,85.09 h1.02 r270
  text "S" at 119.126,83.566 h1.02
  text "->" at 135.255,83.439 h1.02 r180
  text "IG 1" at 26.233,81.762 h0.51
  text "IG 2" at 29.027,81.762 h0.51
  text "IG 3" at 31.821,81.762 h0.51
  text "IG 4" at 34.615,81.762 h0.51
  text "VR" at 50.982,81.416 h0.76
  text "CMP / HALL | IN 1 | IN 2" at 66.548,77.724 h0.51
  text "GND" at 50.367,77.496 h0.51 r90
  text "S" at 134.239,73.914 h1.02
  text "INJ 2" at 83.566,73.152 h0.51
  text "->" at 73.025,72.39 h1.02 r180
  text "->" at 42.483,71.886 h1.02 r180
  text "->" at 60.833,71.374 h1.02
  text "*" at 88.512,71.338 h1.02
  text "->" at 30.81,70.963 h1.02
  text "->" at 139.248,66.89 h1.02 r180
  text "INJ 3" at 83.566,60.706 h0.51
  text "*" at 88.512,58.892 h1.02
  text "RST" at 147.636,58.674 h0.64
  text "EP" at 152.97,58.674 h0.64
  text "EP" at 148.082,55.499 h0.64
  text "SWO" at 152.654,55.499 h0.64
  text "JTDI" at 147.447,52.959 h0.64
  text "EP" at 152.908,52.959 h0.64
  text "CLK" at 147.574,50.419 h0.64
  text "3.3V" at 152.273,50.419 h0.64
  text "INJ 4" at 83.566,48.133 h0.51
  text "IO" at 147.955,47.879 h0.64
  text "GND" at 152.527,47.879 h0.64
  text "*" at 88.385,46.446 h1.02
  text "GND" at 105.76,44.16 h0.51 r90
  text "GND" at 152.146,43.18 h0.51
  text "*" at 148.075,39.715 h1.02
  text "INJ 3" at 165.363,36.866 h0.51 r270
  text "GND / M4" at 50.292,36.703 h0.76
  text "INJ 1" at 83.566,35.687 h0.51
  text "GND / M4" at 170.942,35.306 h0.76
  text "INJ 2" at 165.363,34.072 h0.51 r270
  text "*" at 88.512,34 h1.02
  text "->" at 73.019,32.91 h1.02 r180
  text "->" at 42.737,32.77 h1.02 r180
  text "ECU By M.Markies" at 107.188,32.089 h1.02
  text "->" at 61.347,31.987 h1.02
  text "->" at 31.064,31.847 h1.02
  text "5V" at 129.794,31.75 h0.64 r90
  text "TX 2" at 132.334,31.75 h0.64 r90
  text "RX 2" at 134.874,31.75 h0.64 r90
  text "GND" at 137.414,31.75 h0.64 r90
  text "INJ 1" at 165.363,31.278 h0.51 r270
  text "*" at 101.72,29.682 h1.02
  text "5V" at 130.876,29.005 h0.64 r90
  text "TX 1" at 133.416,28.878 h0.64 r90
  text "RX 1" at 135.956,28.878 h0.64 r90
  text "GND" at 138.496,28.878 h0.64 r90
  text "INJ 4" at 165.363,28.484 h0.51 r270
  text "SCL" at 120.269,28.448 h0.64 r90
  text "SDA" at 122.809,28.448 h0.64 r90
Bottom Overlay:
  lines w0.254: 147.447,87.122 147.447,85.788 147.892,85.344 148.28,85.344
Mechanical 1:
  the board outline again, w0.254

## Text inside footprints (layer, text, board x,y; h text height)
Q6: Top Overlay "A20,3mm" at 75.311,50.292 h0.64 r270
Q7: Top Overlay "A20,3mm" at 75.311,66.827 h0.64 r270
Q8: Top Overlay "A20,3mm" at 44.958,66.675 h0.64 r270
Q9: Top Overlay "A20,3mm" at 44.958,50.292 h0.64 r270
U2: Top Overlay "*" at 105.685,88.281 h0.64 r270
U12: Mechanical 13 "*" at 151.747,67.736 h0.64 r180
U13: Mechanical 13 "*" at 151.747,84.093 h0.64 r180